# EAGLE board JetRacerWIfiAntennaSupport_partsRev5 (EAGLE 9.6.0)

Size 145.88 x 32.4 mm. Coordinates in mm from the lower left corner, seen from the top.
Outline: 8.81,26.97 arc90 5.46,30.37 arc59 2.81,28.87 2.81,25.07 arc59 5.46,23.62 arc90 8.81,26.97
Outline: 9.14,31.2 38.84,17 107.04,17 136.74,31.2 138.74,32.2 arc-5 139.44,32.4 143.04,32.4 arc-59 144.74,31.5 arc-16 145.54,30.1 145.84,28 arc-27 145.44,24.7 arc-6 145.04,23.9 114.44,0 31.44,0 0.84,23.9 arc-6 0.44,24.7 arc-27 0.04,28 0.34,30.1 arc-16 1.14,31.5 arc-59 2.84,32.4 6.44,32.4 arc-5 7.14,32.2 9.14,31.2
Outline: 137.07,26.97 arc-90 140.42,30.37 arc-59 143.07,28.87 143.07,25.07 arc-59 140.42,23.62 arc-90 137.07,26.97
Copper layers (1*16): Top 0.035mm / dielectric 1.5mm / Bottom 0.035mm
Design rules "SeeedStudio_2layer_DRU_no_angle_20140221": minimum track width 6mil, minimum drill 12mil, track to track 6mil, track to pad 6mil, pad to pad 6mil, via to via 6mil, smd to smd 0mil, copper to edge 10mil, drill to drill 10mil, minimum pad ring 10mil, minimum via ring 6mil, stop-mask expansion 2mil, vias tented up to drill 100mil, thermal gap 10mil
Holes 3.6 mm at 50.94,3.5 50.94,13.5 94.94,3.5 94.94,13.5

## Placement (x,y rotation side)
E$1  [LOGO_FABO_L]  72.78,5.73 0 top

## Library data of the parts
E$1 = FaBo-Logo

## Text on the board
tPlace: JR-WS | Rev5 | TOP
bPlace: BOTTOM
tDocu: UPPER PANEL LINE | 長径 6.7mm / 短径 5.7mm *2 | Φ3.6mm*4 | JETSON NANO LINE | JETSON NANO SPECER | JetRacer Wifi Support Rev5
bDocu: UPPER PANEL LINE | 長径 6.7mm / 短径 5.7mm *2